# Altium PCB ESP_Watch_PCB.PcbDoc (part 1 of 2)
Units mm, origin at the board's own origin, x right, y up, seen from the top; angles counter-clockwise.
Board outline 29.7 x 35.5 mm, 4 copper layers (TOP, LY2 - GND, LY3 - GND, BOTTOM), stack 0.771 mm thick; 81 components, 71 nets, 299 pads, 0 vias.
Unrouted connection lines stored in the file: 101.
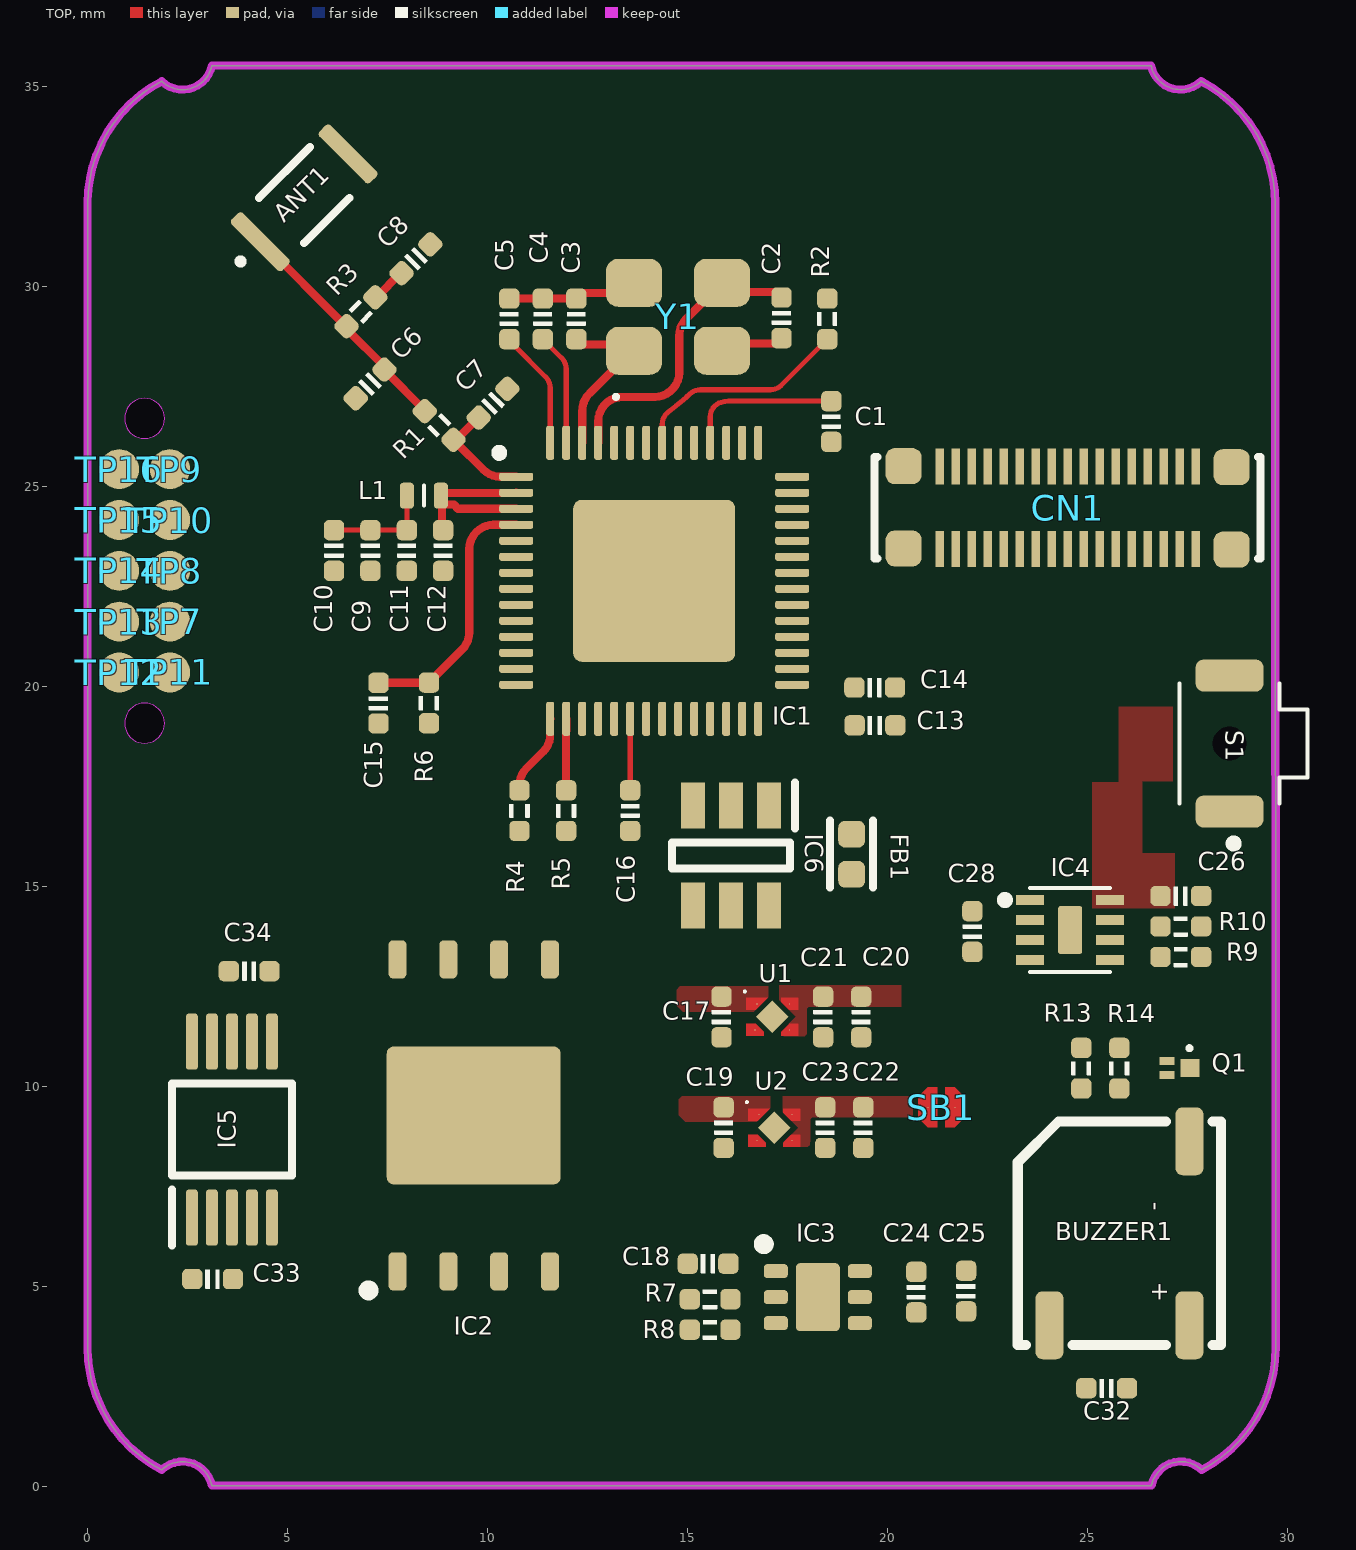
[diagram p0: TOP view]
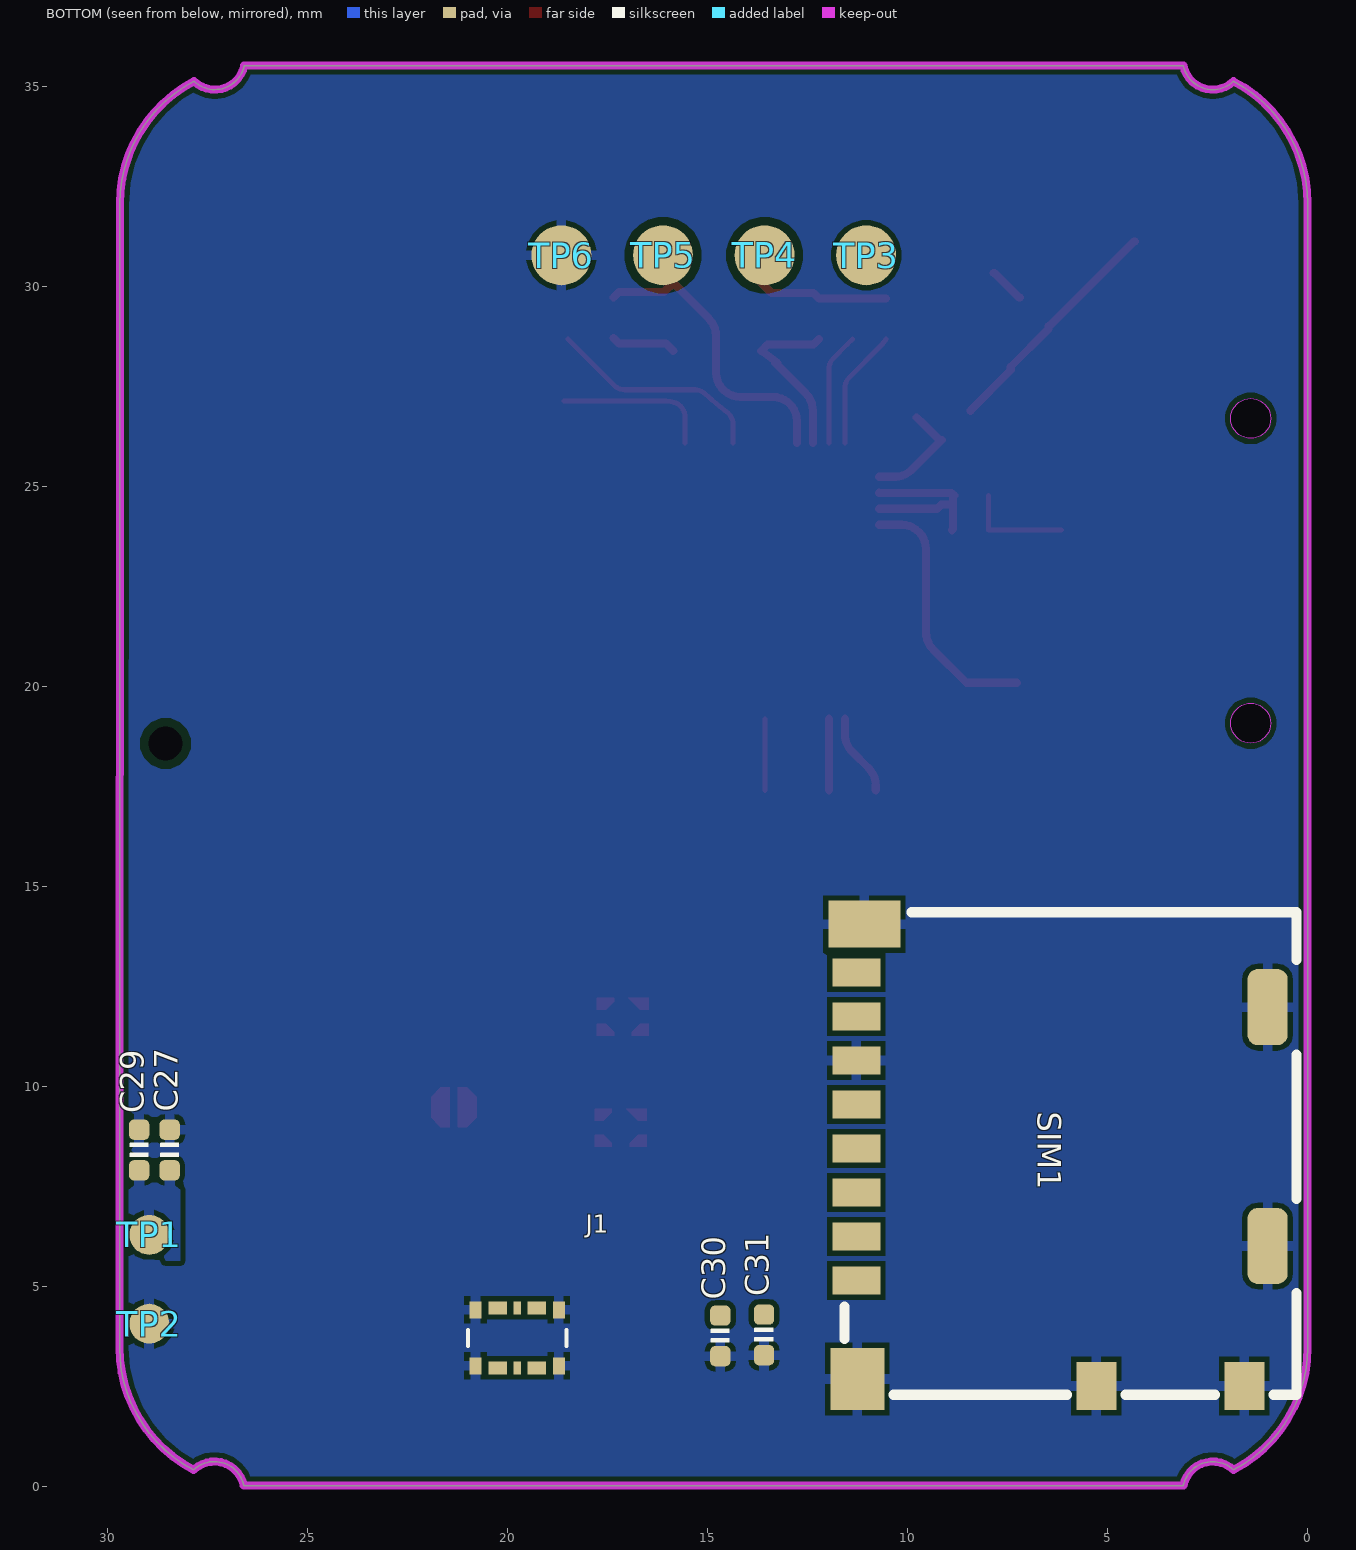
[diagram p1: BOTTOM view, seen from below]
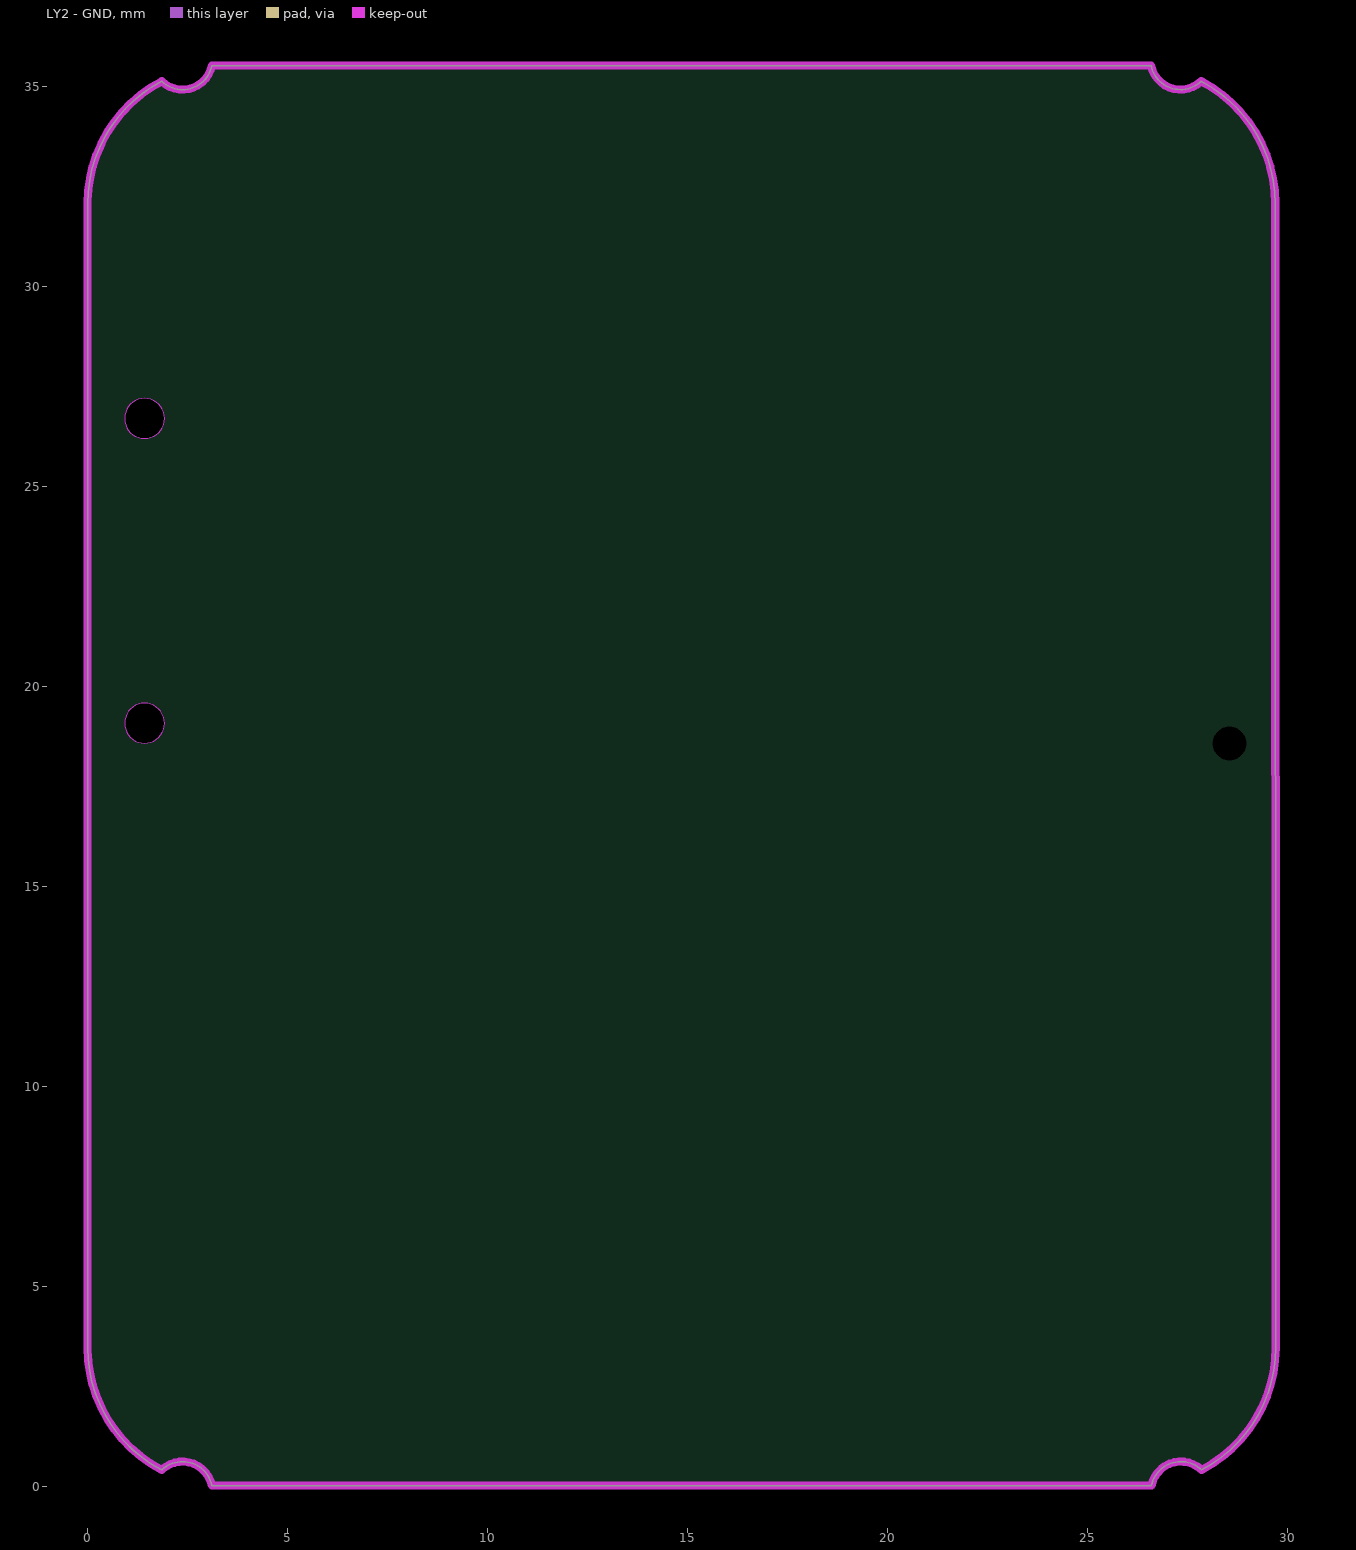
[diagram p2: LY2 - GND]
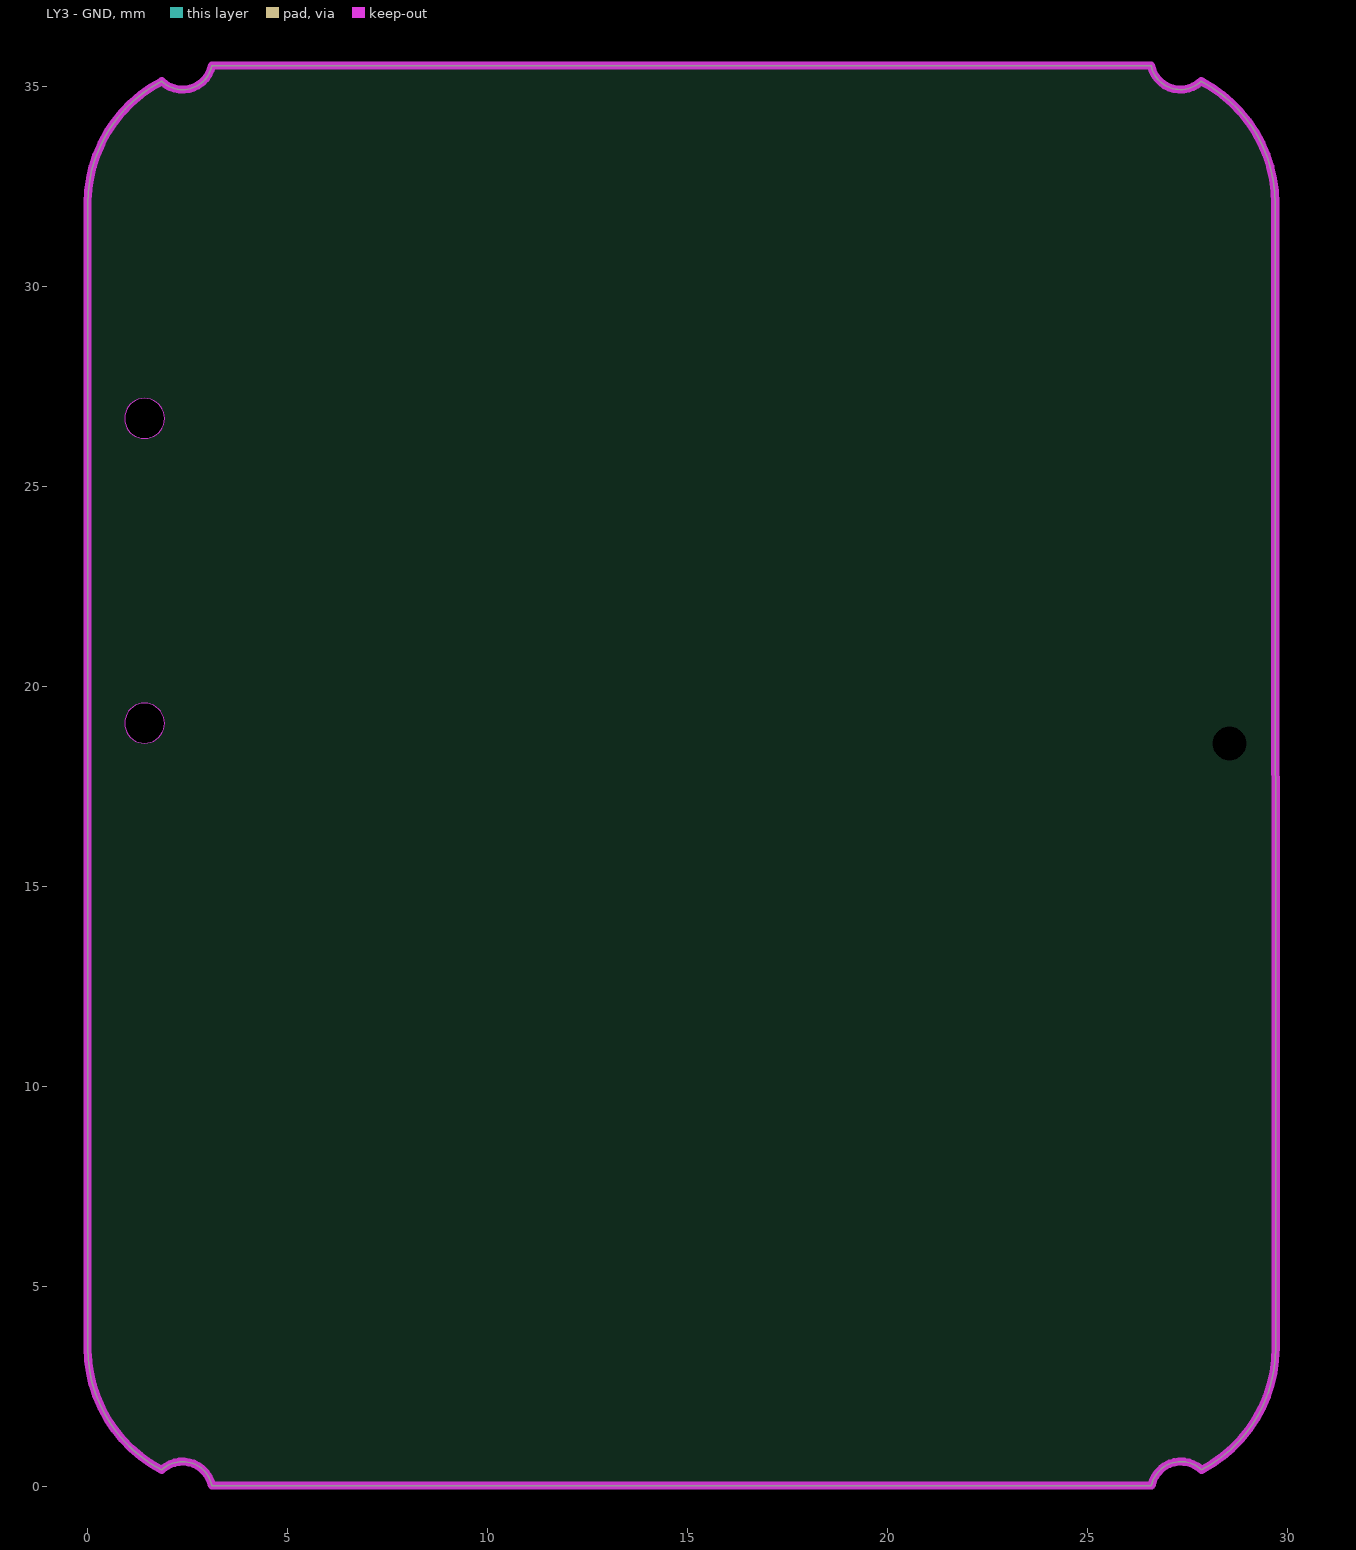
[diagram p3: LY3 - GND]

## Layer stack, top to bottom
Top Solder: solder mask 0.0432, Solder Resist, Dk 3.5
TOP: signal copper 0.035
Dielectric 2: prepreg 0.2104, PP-022, Dk 4.5
LY2 - GND: signal copper 0.0152
Dielectric2: core 0.25, Core-028, Dk 4.3
LY3 - GND: signal copper 0.0152
Dielectric 3: prepreg 0.2104, PP-022, Dk 4.5
BOTTOM: signal copper 0.035
Bottom Solder: solder mask 0.0432, Solder Resist, Dk 3.5

## Board outline
0,3.466 ccw(c3.45,3.466) 1.852,0.408 cw(c2.371,-0.134) 3.106,0.017 26.596,0.017 cw(c27.331,-0.133) 27.849,0.409 ccw(c26.252,3.467) 29.702,3.467 29.692,32.067 ccw(c26.242,32.067) 27.839,35.124 cw(c27.32,35.666) 26.585,35.516 3.106,35.515 cw(c2.371,35.665) 1.852,35.124 ccw(c3.45,32.066) 0,32.066
cut-out: 0.922,19.075 ccw(c1.422,19.075) 1.422,18.575 ccw(c1.422,19.075) 1.922,19.075 ccw(c1.422,19.075) 1.422,19.575 ccw(c1.422,19.075)
cut-out: 0.922,26.695 ccw(c1.422,26.695) 1.422,26.195 ccw(c1.422,26.695) 1.922,26.695 ccw(c1.422,26.695) 1.422,27.195 ccw(c1.422,26.695)

## Design rules (kind name [scope] priority, off if disabled: settings)
Clearance DIFFPAIR_CLEARANCE [InAnyDifferentialPair] p1: gap=0.127 ignorepadtopadclearanceinfootprint=TRUE except(0.152: Arc-Hole Track-Hole; 0.203: Arc-Poly Track-Poly SMDPad-Poly THPad-Poly Via-Poly Fill-Poly Poly-Poly)
Clearance [All] p2: gap=0.127 ignorepadtopadclearanceinfootprint=FALSE except(0.076: Arc-Fill Arc-Region Arc-Text Track-Text SMDPad-SMDPad SMDPad-THPad SMDPad-Via SMDPad-Text THPad-THPad THPad-Via THPad-Text Via-Text Fill-Text Poly-Text Region-Text Text-Text Text-Hole; 0.203: Arc-THPad Arc-Via Arc-Hole Track-THPad Track-Via Track-Hole SMDPad-Hole THPad-Hole Via-Hole Fill-Hole Poly-Hole Region-Hole)
ComponentClearance [All] p1: gap=0 collisioncheckmode=3 verticalgap=0.254 showdistances=FALSE
DiffPairsRouting [All] p1: maxlimit=0.127 minlimit=0.127 mostfreqgap=0.127 toplayer_minwidth=0.102 toplayer_maxwidth=0.152 toplayer_prefwidth=0.152 midlayer1_minwidth=0.102 midlayer1_maxwidth=0.152 midlayer1_prefwidth=0.152 midlayer6_minwidth=0.102 midlayer6_maxwidth=0.152 midlayer6_prefwidth=0.152 bottomlayer_minwidth=0.102 bottomlayer_maxwidth=0.152 bottomlayer_prefwidth=0.152 maxuncoupledlength=12.7
HoleSize BlindViaHoleSize [InDrillLayerPair('TOP - LY4 - GND') OR InDrillLayerPair('TOP - LY3 - SIG') OR InDrillLayerPair('TOP - LY2 - GND') OR InDrillLayerPair('LY7 - GND - BOTTOM') OR InDrillLayerPair('LY6 - SIG - BOTTOM')] p1: absolutevalues=TRUE maxlimit=2.54 minlimit=0.1 maxpercent=80.000 minpercent=20.000
HoleSize [All] p2: absolutevalues=TRUE maxlimit=3.835 minlimit=0.2 maxpercent=80.000 minpercent=20.000
HoleToHoleClearance HoleToHoleClearance_1 [WithinRoom('ApolloBGA') OR WithinRoom('JLINKOB')] p1: gap=0.102 allowstackedmicrovias=TRUE
HoleToHoleClearance [All] p2: gap=0.254 allowstackedmicrovias=TRUE
MinimumSolderMaskSliver APOLLOBGA_MinimumSolderMaskSliver [WithinRoom('ApolloBGA') vs HasFootprint('bga131_0p35_4p7x4p7')] p1: minsoldermaskwidth=0.025
MinimumSolderMaskSliver [All] p2: minsoldermaskwidth=0.025
PlaneConnect [All] p1: planeconnectstyle=Direct reliefexpansion=0.508 reliefentries=4 reliefconductorwidth=0.254 reliefairgap=0.254
PolygonConnect Solderbridge_PolygonConnect [(HasFootprint('sb39x18_shorted') OR HasFootprint('sb39x18')) AND InNetClass('Solderbridges')] p1: connectstyle=Direct reliefconductorwidth=0.254 reliefentries=4 polygonreliefangle="90 Angle" airgapwidth=0.254
PolygonConnect [All] p2: thpad.connectstyle=Relief thpad.reliefconductorwidth=0.254 thpad.reliefentries=4 thpad.polygonreliefangle="90 Angle" thpad.airgapwidth=0.254 smdpad.connectstyle=Relief smdpad.reliefconductorwidth=0.254 smdpad.reliefentries=4 smdpad.polygonreliefangle="90 Angle" smdpad.airgapwidth=0.127 via.connectstyle=Direct via.reliefconductorwidth=0.254 via.reliefentries=4 via.polygonreliefangle="90 Angle" via.airgapwidth=0.254
RoutingVias [All] p1: holewidth=0.3 width=0.45 viastyle="Through Hole" minholewidth=0.3 minwidth=0.45 maxholewidth=0.635 maxwidth=1.27
RoutingVias APOLLOBGA_RoutingVias [WithinRoom('ApolloBGA')] p2: holewidth=0.102 width=0.203 viastyle="Through Hole" minholewidth=0.076 minwidth=0.152 maxholewidth=0.635 maxwidth=1.27
RoutingVias JLINKOB_RoutingVias [WithinRoom('JLINKOB')] p3: holewidth=0.102 width=0.203 viastyle="Through Hole" minholewidth=0.076 minwidth=0.152 maxholewidth=0.635 maxwidth=1.27
ShortCircuit Antenna_ShortCircuit [(InNet('GND') AND InNet('NetA1_1')) vs HasFootprint('PCB_MIFA_ANTENNA')] p1: allowed=TRUE
ShortCircuit Solderbridge_ShortCiruit [HasFootprint('sb39x18_shorted') vs InNetClass('Solderbridges')] p2: allowed=TRUE
SilkToSilkClearance [All] p1: silktosilkclearance=0
SilkToSolderMaskClearance [IsPad] p1: minsilkscreentomaskgap=0 clearancetoexposedcopper=FALSE
SolderMaskExpansion [All] p1: expansion=0.05 istentingtop=FALSE
UnRoutedNet [All] p1: checkbadconnections=TRUE
Width [All] p1: maxlimit=1.27 minlimit=0.076 preferedwidth=0.102 midlayer1_maxwidth=0.508 midlayer1_prefwidth=0.089 midlayer6_maxwidth=0.508 midlayer6_prefwidth=0.089 bottomlayer_maxwidth=0.508 minimp=50.000000 maximp=50.000000 favimp=50.000000
Width APOLLOBGA_WIDTH [WithinRoom('ApolloBGA')] p2: maxlimit=0.508 minlimit=0.076 preferedwidth=0.102 midlayer1_prefwidth=0.089 midlayer6_prefwidth=0.089 minimp=50.000000 maximp=50.000000 favimp=50.000000
Width JLINKOB_WIDTH [WithinRoom('JLINKOB')] p3: maxlimit=0.508 minlimit=0.076 preferedwidth=0.102 midlayer1_prefwidth=0.089 midlayer6_prefwidth=0.089 minimp=50.000000 maximp=50.000000 favimp=50.000000
20 further rules are at their usual default settings.

## Classes and differential pairs
net class QSPI: GPIO5 GPIO6 GPIO7 GPIO8 GPIO9 GPIO13
component class "U_P02_ AMOLED": CN1
component class P07_Peripheral: BUZZER1 C30 C31 C32 C33 C34 IC5 J1 Q1 R13 R14 SIM1
component class "U_P06_ Apollo4B_core": ANT1 C1 C2 C3 C4 C5 C6 C7 C8 C9 C10 C11 C12 C13 C14 C15 C16 IC1 IC2 L1 R1 R2 R3 R4 R5 R6 S1 Y1
component class "U_P05_ Debugger": C60 J13 R37 R38 R39 R40 SB40 TP7 TP8 TP9 TP10 TP11 TP12 TP13 TP14 TP15 TP16
component class "U_P04_ USB": C36 C37 C38 D8 FB1 FB2 IC6 J5 J6 R49 SB17 SW4 TP3 TP4 TP5 TP6
component class "U_P03_ Power Supplies": C17 C18 C19 C20 C21 C22 C23 C24 C25 C26 C27 C28 C29 C35 C39 C40 C41 C43 C72 C73 C74 C75 C76 C77 C78 C79 D5 IC3 IC4 Q5 R7 R8 R9 R10 R36 R51 R52 R53 R54 R56 R57 R66 R67 SB1 SB13 SB16 SB39 SB59 SB60 SB61 TP1 TP2 U1 U2 U15 U16
differential pair AP_USB: +AP_USB_P -AP_USB_N

## Components (designator, comment, footprint, x,y, rotation, side; value= is the part's Value field where it differs from the comment)
ANT1 "ANT3216LL00R2400A" ANT3216LL00R2400A 5.414,32.211 r45 top
BUZZER1 "4000Hz" BUZ-SMD_L5.0-W5.5-P4.60 25.794,6.325 r90 top
C1 "100nF" CAP_0402 18.593,26.619 r270 top
C2 "22pF" CAP_0402 17.348,29.21 r270 top
C3 "22pF" CAP_0402 12.217,29.185 r90 top
C4 "1uF" CAP_0402 11.379,29.185 r90 top
C5 "10nF" CAP_0402 10.541,29.185 r90 top
C6 "TBD" CAP_0402 7.061,27.559 r225 top
C7 "TBD" CAP_0402 10.135,27.076 r45 top
C8 "TBD" CAP_0402 8.208,30.687 r225 top
C9 "10uF" CAP_0402 7.069,23.393 r270 top
C10 "1uF" CAP_0402 6.159,23.393 r270 top
C11 "100nF" CAP_0402 7.98,23.393 r270 top
C12 "100nF" CAP_0402 8.89,23.393 r270 top
C13 "100nF" CAP_0402 19.685,19.025 r0 top
C14 "1uF" CAP_0402 19.677,19.969 r0 top
C15 "100nF" CAP_0402 7.272,19.579 r270 top
C16 "100nF" CAP_0402 13.564,16.891 r270 top
C17 "2.2uF" CAP_0402 15.848,11.733 r270 top
C18 "2.2uF" CAP_0402 15.511,5.565 r180 top
C19 "2.2uF" CAP_0402 15.9,8.966 r270 top
C20 "1uF" CAP_0402 19.34,11.733 r270 top
C21 "100nF" CAP_0402 18.388,11.733 r270 top
C22 "1uF" CAP_0402 19.393,8.966 r270 top
C23 "100nF" CAP_0402 18.44,8.966 r270 top
C24 "1uF" CAP_0402 20.718,4.854 r90 top
C25 "100nF" CAP_0402 21.962,4.88 r90 top
C26 "2.2uF" CAP_0402 27.33,14.757 r0 top
C27 "2.2uF" CAP_0402 28.448,8.407 r90 bottom
C28 "2.2uF" CAP_0402 22.119,13.868 r270 top
C29 "100nF" CAP_0402 29.21,8.407 r90 bottom
C30 "100nF" CAP_0402 14.681,3.759 r270 bottom
C31 "1uF" CAP_0402 13.589,3.785 r270 bottom
C32 "100nF" CAP_0402 25.476,2.451 r180 top
C33 "1uF" CAP_0402 3.124,5.182 r0 top
C34 "1uF" CAP_0402 4.039,12.878 r180 top
CN1 "AXE534127" CONN-SMD_34P-P0.40_AXE534127 24.5,24.46 r180 top
FB1 "80Ω @ 100MHz" IPC_A 19.101,15.799 r90 top
IC1 "ESP32-S3R8" QFN40P700X700X90-57N-D 14.165,22.636 r0 top
IC2 "W25Q256JVEIQ_TR" SON127P800X600X80-9N-D 9.652,9.271 r90 top
IC3 "TLV75801PDRVR" SON65P200X200X80-7N 18.254,4.727 r0 top
IC4 "SGM4056-6.8YTDE8G_TR" TDFN-8L_L2.0-W2.0-P0.50-BL-EP 24.563,13.905 r270 top
IC5 "DRV2605LDGSR" SOP50P490X110-10N 3.607,8.915 r90 top
IC6 "USBLC6-2SC6" SOT95P280X145-6N 16.078,15.773 r270 top
J1 "BM29B0.6-2DS_2-0.35V_53_" BM29B062DS2035V53 19.761,3.708 r0 bottom
L1 "2nH" LQG15WH0N7B02D 8.407,24.765 r0 top
Q1 "DMN1260UFA-7B" DMN1260UFA7B 27.294,10.451 r270 top
R1 "0Ω" RES_0402 8.787,26.519 r315 top
R2 "499Ω" RES_0402 18.491,29.185 r90 top
R3 "TBD" RES_0402 6.833,29.362 r225 top
R4 "2.2kΩ" RES_0402 10.795,16.891 r90 top
R5 "2.2kΩ" RES_0402 11.963,16.891 r90 top
R6 "10kΩ" RES_0402 8.534,19.583 r270 top
R7 "61.9kΩ" RES_0402 15.562,4.676 r0 top
R8 "20kΩ" RES_0402 15.562,3.914 r180 top
R9 "10kΩ" RES_0402 27.33,13.233 r180 top
R10 "10kΩ" RES_0402 27.33,13.995 r0 top
R13 "10Ω" RES_0402 24.841,10.452 r270 top
R14 "10kΩ" RES_0402 25.794,10.452 r90 top
S1 "B3U-3000PM-B" B3U3000PMB 28.55,18.567 r270 top
SB1 "SBO" SB39X18 21.342,9.474 r180 top
SIM1 "1040310811" SIM-SMD_8P-1040310811 5.944,8.28 r270 bottom
TP1 "PAD" TPPAD_1.0MM 28.955,6.285 r180 bottom
TP2 "PAD" TPPAD_1.0MM 28.955,4.063 r180 bottom
TP3 "PAD" TPPAD_1.5MM 11.035,30.775 r90 bottom
TP4 "PAD" TPPAD_1.5MM 13.575,30.775 r90 bottom
TP5 "PAD" TPPAD_1.5MM 16.115,30.775 r90 bottom
TP6 "PAD" TPPAD_1.5MM 18.655,30.775 r90 bottom
TP7 "PAD" TPPAD_1.0MM 2.057,21.615 r90 top
TP8 "PAD" TPPAD_1.0MM 2.057,22.885 r180 top
TP9 "PAD" TPPAD_1.0MM 2.057,25.425 r180 top locked
TP10 "PAD" TPPAD_1.0MM 2.057,24.155 r180 top locked
TP11 "PAD" TPPAD_1.0MM 2.057,20.345 r90 top locked
TP12 "PAD" TPPAD_1.0MM 0.787,20.345 r90 top locked
TP13 "PAD" TPPAD_1.0mm 0.787,21.615 r90 top locked
TP14 "PAD" TPPAD_1.0mm 0.787,22.885 r90 top locked
TP15 "PAD" TPPAD_1.0mm 0.787,24.155 r90 top locked
TP16 "PAD" TPPAD_1.0mm 0.787,25.425 r90 top locked
U1 "NCP114AMX330TBG" REG_NCP114AMX330TBG 17.118,11.733 r270 top
U2 "NCP114AMX180TBG" REG_NCP114AMX330TBG 17.17,8.966 r270 top
Y1 "X322540MPB4SI" X322540MPB4SI 14.757,29.235 r0 top

## Footprints (in the part's own frame and the unit in brackets; to place one, negate y for a bottom-side part, rotate by r counter-clockwise, add the part's x,y. Pads: shape width x height; smd on the part's side, far side on the other; paste and mask are expansions set on the pad)
ANT3216LL00R2400A [mm]
  rrect50% 0.4x1.8 smd: 1(-1.55,0) 2(1.55,0)
  silkscreen extent -2.3,-0.8 1,0.8, body extent -1.6,-0.8 1.6,0.8, height 1.21
B3U3000PMB [mm]
  rrect50% 0.8x1.7 smd: 1(1.7,0) 2(-1.7,0)
  round 0.425 hole 0.85 unplated: 3(0,0)
  silkscreen extent -1.5,-1.25 2.6,1.95, body extent -2,-1.25 2,1.95, height 1.2
BM29B062DS2035V53 [mm]
  rect 0.46x0.32 smd: 1(-0.49,-0.75) 2(-0.49,0.75) 5(0.49,-0.75) 6(0.49,0.75)
  rect 0.18x0.32 smd: 3(0,-0.75) 4(0,0.75)
  rect 0.3x0.42 smd: MP1(-1.04,-0.7) MP2(-1.04,0.7) MP3(1.04,-0.7) MP4(1.04,0.7)
  silkscreen extent -1.23,-0.2 1.23,0.2, body extent -1.23,-0.89 1.23,0.89, height 0.8
BUZ-SMD_L5.0-W5.5-P4.60 [mm]
  rrect50% 1.7x0.7 smd paste+0 mask+0.051: 1(-2.3,-1.75) 2(2.3,-1.75) 3(-2.3,1.75)
  silkscreen extent -2.79,-2.54 2.79,2.54, body extent -2.6,-2.63 2.6,2.63, height 2.01
CAP_0402 [mil]
  rrect50% 20x20 smd: 1(-20,0) 2(20,0)
  silkscreen extent -7,-9 7,9, body extent -20,-10 20,10, height 20
CONN-SMD_34P-P0.40_AXE534127 [mm]
  rect 0.21x0.9 smd: 1(-3.2,-1.03) 2(-2.8,-1.03) 3(-2.4,-1.03) 4(-2,-1.03) 5(-1.6,-1.03) 6(-1.2,-1.03) 7(-0.8,-1.03) 8(-0.4,-1.03) 9(0,-1.03) 10(0.4,-1.03) 11(0.8,-1.03) 12(1.2,-1.03) 13(1.6,-1.03) 14(2,-1.03) 15(2.4,-1.03) 16(2.8,-1.03) 17(3.2,-1.03) 18(3.2,1.03) 19(2.8,1.03) 20(2.4,1.03) 21(2,1.03) 22(1.6,1.03) 23(1.2,1.03) 24(0.8,1.03) 25(0.4,1.03) 26(0,1.03) 27(-0.4,1.03) 28(-0.8,1.03) 29(-1.2,1.03) 30(-1.6,1.03) 31(-2,1.03) 32(-2.4,1.03) 33(-2.8,1.03) 34(-3.2,1.03)
  rrect50% 0.9x0.9 smd: 35(-4.1,1.044) 36(-4.1,-1.016) 37(4.1,-1.044) 38(4.1,1.016)
  silkscreen extent -4.83,-1.27 4.83,1.27, body extent -4.65,-1.25 4.65,1.25, height 0.77
DMN1260UFA7B [mm]
  rect 0.45x0.475 smd: 1(0,0.263)
  rect 0.2x0.375 smd: 2(-0.175,-0.312) 3(0.175,-0.312)
  silkscreen extent -0.55,0.2 -0.45,0.3, body extent -0.33,-0.43 0.33,0.43, height 0.35
IPC_A [mm]
  rrect50% 0.668x0.672 smd mask+0.051: 1(-0.502,0) 2(0.502,0)
  silkscreen extent -0.83,-0.54 0.84,0.54, body extent -0.53,-0.27 0.53,0.28, height 0.4
LQG15WH0N7B02D [mm]
  rrect50% 0.35x0.65 smd: 1(-0.425,0) 2(0.425,0)
  silkscreen extent 0,-0.25 0,0.25, body extent -0.5,-0.25 0.5,0.25, height 0.55
QFN40P700X700X90-57N-D [mm]
  rrect50% 0.85x0.2 smd: 1(-3.45,2.6) 2(-3.45,2.2) 3(-3.45,1.8) 4(-3.45,1.4) 5(-3.45,1) 6(-3.45,0.6) 7(-3.45,0.2) 8(-3.45,-0.2) 9(-3.45,-0.6) 10(-3.45,-1) 11(-3.45,-1.4) 12(-3.45,-1.8) 13(-3.45,-2.2) 14(-3.45,-2.6) 29(3.45,-2.6) 30(3.45,-2.2) 31(3.45,-1.8) 32(3.45,-1.4) 33(3.45,-1) 34(3.45,-0.6) 35(3.45,-0.2) 36(3.45,0.2) 37(3.45,0.6) 38(3.45,1) 39(3.45,1.4) 40(3.45,1.8) 41(3.45,2.2) 42(3.45,2.6)
  rrect50% 0.2x0.85 smd: 15(-2.6,-3.45) 16(-2.2,-3.45) 17(-1.8,-3.45) 18(-1.4,-3.45) 19(-1,-3.45) 20(-0.6,-3.45) 21(-0.2,-3.45) 22(0.2,-3.45) 23(0.6,-3.45) 24(1,-3.45) 25(1.4,-3.45) 26(1.8,-3.45) 27(2.2,-3.45) 28(2.6,-3.45) 43(2.6,3.45) 44(2.2,3.45) 45(1.8,3.45) 46(1.4,3.45) 47(1,3.45) 48(0.6,3.45) 49(0.2,3.45) 50(-0.2,3.45) 51(-0.6,3.45) 52(-1,3.45) 53(-1.4,3.45) 54(-1.8,3.45) 55(-2.2,3.45) 56(-2.6,3.45)
  rrect10% 4.05x4.05 smd: 57(0,0)
  silkscreen extent -3.97,3.1 -3.78,3.3, body extent -3.55,-3.55 3.55,3.55, height 0.9
REG_NCP114AMX330TBG [mm]
  round 0.025 smd: 1(-0.325,-0.385) 2(0.325,-0.435) 3(0.325,0.435) 4(-0.325,0.435)
  rect 0.58x0.58 smd rot 45 mask+0: 5(0,0)
  TOP region: 0.475,0.22 0.375,0.22 0.175,0.42 0.175,0.65 0.475,0.65
  TOP region: -0.175,0.42 -0.375,0.22 -0.475,0.22 -0.475,0.65 -0.175,0.65
  TOP region: -0.175,-0.42 -0.175,-0.65 -0.475,-0.65 -0.475,-0.12
  TOP region: 0.475,-0.65 0.175,-0.65 0.175,-0.42 0.375,-0.22 0.475,-0.22
  silkscreen extent -0.66,-0.71 -0.61,-0.66, body extent -0.5,-0.5 0.5,0.5, height 0.58
RES_0402 [mil]
  rrect50% 20x20 smd: 1(-20,0) 2(20,0)
  silkscreen extent -7,-10 6,10, body extent -20,-10 20,10, height 14
SB39X18 [mil] "SB39X18"
  round 1 smd: 1(-13.25,0) 2(13.25,0)
  TOP region: 22.5,10.4 22.5,-10.4 13.3,-19.7 4,-19.7 4,19.7 13.3,19.7 22.5,10.4
  TOP region: -22.5,-10.4 -22.5,10.4 -13.3,19.7 -4,19.7 -4,-19.7 -13.3,-19.7 -22.5,-10.4
  TOP region: 22.5,10.4 22.5,-10.4 13.3,-19.7 4,-19.7 4,19.7 13.3,19.7 22.5,10.4
  TOP region: -22.5,-10.4 -22.5,10.4 -13.3,19.7 -4,19.7 -4,-19.7 -13.3,-19.7 -22.5,-10.4
SIM-SMD_8P-1040310811 [mm]
  rect 0.7x1.2 smd paste+0 mask+0.051: 1(3.138,-5.337) 2(2.037,-5.337) 3(0.938,-5.337) 4(-0.162,-5.337) 5(-1.263,-5.337) 6(-2.363,-5.337) 7(-3.462,-5.337) 8(-4.562,-5.337)
  rect 1.17x1.8 smd paste+0 mask+0.051: 9(-5.773,-5.138)
  rect 1.55x1.35 smd paste+0 mask+0.051: 10(5.598,-5.313)
  rect 1.2x1 smd paste+0 mask+0.051: 11(5.773,0.663) 12(5.773,4.363)
  rrect50% 1.9x1 smd paste+0 mask+0.051: 13(2.273,4.944) 14(-3.697,4.944)
  silkscreen extent -6.07,-5.64 5.99,5.67, body extent -5.97,-5.55 5.98,5.85, height 1.47
SON65P200X200X80-7N [mm]
  rrect50% 0.6x0.35 smd: 1(-1.05,0.65) 2(-1.05,0) 3(-1.05,-0.65) 4(1.05,-0.65) 5(1.05,0) 6(1.05,0.65)
  rrect20% 1.1x1.7 smd: 7(0,0)
  silkscreen extent -1.47,1.2 -1.22,1.45, body extent -1.05,-1 1.05,1, height 0.8
SON127P800X600X80-9N-D [mm]
  rrect50% 0.95x0.45 smd: 1(-3.9,1.905) 2(-3.9,0.635) 3(-3.9,-0.635) 4(-3.9,-1.905) 5(3.9,-1.905) 6(3.9,-0.635) 7(3.9,0.635) 8(3.9,1.905)
  rrect10% 3.45x4.35 smd: 9(0,0)
  silkscreen extent -4.5,2.5 -4.25,2.75, body extent -4.05,-3 4.05,3, height 0.8
SOP50P490X110-10N [mm]
  rrect50% 1.4x0.3 smd: 1(-2.2,1) 2(-2.2,0.5) 3(-2.2,0) 4(-2.2,-0.5) 5(-2.2,-1) 6(2.2,-1) 7(2.2,-0.5) 8(2.2,0) 9(2.2,0.5) 10(2.2,1)
  silkscreen extent -2.9,-1.5 1.15,1.5, body extent -2.45,-1.5 2.45,1.5, height 1.1
SOT95P280X145-6N [mm]
  rect 1.15x0.6 smd: 1(-1.25,0.95) 2(-1.25,0) 3(-1.25,-0.95) 4(1.25,-0.95) 5(1.25,0) 6(1.25,0.95)
  silkscreen extent -1.83,-1.48 0.33,1.6, body extent -1.4,-1.48 1.4,1.48, height 1.45
TDFN-8L_L2.0-W2.0-P0.50-BL-EP [mm]
  rect 0.25x0.7 smd: 1(-0.75,-1) 2(-0.25,-1) 3(0.25,-1) 4(0.75,-1) 5(0.75,1) 6(0.25,1) 7(-0.25,1) 8(-0.75,1)
  rrect20% 1.2x0.6 smd: 9(0,-0.001)
  silkscreen extent -1.05,-1.68 1.05,1, body extent -1,-1.05 1,1.05, height 0.8
TPPAD_1.0MM [mm] "A 1.5mm Copper Pad Testpoint"
  round 1 smd paste-0.75: TP(0,0)
TPPAD_1.0mm [mm] "A 1.5mm Copper Pad Testpoint"
  round 1 smd paste-0.75: TP(0,0)
TPPAD_1.5MM [mm] "A 1.5mm Copper Pad Testpoint"
  round 1.5 smd paste-0.75: TP(0,0)
  body extent -0.75,-0.75 0.75,0.75, height 0.1
X322540MPB4SI [mm]
  rrect50% 1.4x1.2 smd: 1(-1.1,-0.85) 2(1.1,-0.85) 3(1.1,0.85) 4(-1.1,0.85)
  silkscreen extent -1.6,-2.05 -1.5,-1.95, body extent -1.68,-1.33 1.68,1.33, height 0.9

## Part data
ANT1: "Antenna", Manufacturer_Name="Pulse Electronics", Mouser Part Number=603-ANT3216LL00R2400, Datasheet Link=https://eu.mouser.com/datasheet/2/336/datasheet_ant3216ll00r2400a_v1_1617827483-2529684.pdf, Height=1.35mm, Manufacturer_Part_Number=ANT3216LL00R2400A, Mouser Price/Stock=https://www.mouser.co.uk/ProductDetail/Pulse-Electronics/ANT3216LL00R2400A?qs=VAB4DzKv5wVywAIgVVebaA%3D%3D
BUZZER1: library part MLT-5020, JLCPCB Part Class=扩展库, Manufacturer=华能, Add into BOM=yes, Convert to PCB=yes, Datasheet=https://atta.szlcsc.com/upload/public/pdf/source/20210811/111454390007D221D7259018FB170E62.pdf, Device=MLT-5020, Height=2.5mm, LCSC Part Name=MLT-5020, Length=5.2mm, Manufacturer Part=MLT-5020, Name=4000Hz, Oscillator Circuit=无源(外部驱动), Supplier=LCSC, Supplier Footprint=SMD,5x5mm, Supplier Part=C94598, Symbol=MLT-5020, Technology Type=电磁式, Width=5.2mm
C1 C2 C3 C5 C6 C7 C8 C9 C11 C12 C13 C15 C16: library part Capacitor, "NONE", Capacitance=1uF, Case Code (Imperial)=0402, Case Code (Metric)=1005, Dielectric=X5R, Manufacturer=Samsung, Manufacturer Part Number=CL05A105MP5NNNC, Max Operating Temperature=85°C, Min Operating Temperature=-55°C, Package Quantity=1, Supplier Part Number 1=82AC9184, Tolerance=20%, Voltage Rating=10V, AMBIQ PN=CL05A105KP5NNNC, Case/Package=0402, Category="Ceramic Capacitors", ComponentLink1Description=https://datasheet.ciiva.com/25802/cl05a105mp5nnnc-25802049.pdf?src-supplier=Digi-Key, ComponentLink1URL=https://datasheet.ciiva.com/25802/cl05a105mp5nnnc-25802049.pdf?src-supplier=Digi-Key, Construction=Flat, Depth=0.5mm, Height=0.5mm, Lead Free="Lead Free", Length=1mm, Mount="Surface Mount", Packaging="Tape and Reel", Radiation Hardening=No, RoHS=Yes, RoHS Compliant=Yes, Series=CL, Supplier 1=Newark, Thickness=0.022inch, Voltage Rating (DC)=10V, Width=0.02inch
C4 C10 C14 C20 C24 C31 C33 C34: library part Capacitor, "NONE", Case Code (Imperial)=0402, Case Code (Metric)=1005, Dielectric=X5R, Manufacturer=Samsung, Manufacturer Part Number=CL05A105MP5NNNC, Max Operating Temperature=85°C, Min Operating Temperature=-55°C, Package Quantity=1, Supplier Part Number 1=82AC9184, Tolerance=20%, Voltage Rating=10V, AMBIQ PN=CL05A105KP5NNNC, Capacitance=1uF, Case/Package=0402, Category="Ceramic Capacitors", ComponentLink1Description=https://datasheet.ciiva.com/25802/cl05a105mp5nnnc-25802049.pdf?src-supplier=Digi-Key, ComponentLink1URL=https://datasheet.ciiva.com/25802/cl05a105mp5nnnc-25802049.pdf?src-supplier=Digi-Key, Construction=Flat, Depth=0.5mm, Height=0.5mm, Lead Free="Lead Free", Length=1mm, Mount="Surface Mount", Packaging="Tape and Reel", Radiation Hardening=No, RoHS=Yes, RoHS Compliant=Yes, Series=CL, Supplier 1=Newark, Thickness=0.022inch, Voltage Rating (DC)=10V, Width=0.02inch
C17 C18 C26 C27 C28: library part Capacitor, "NONE", Case Code (Imperial)=0402, Case Code (Metric)=1005, Manufacturer=Samsung, Manufacturer Part Number=CL05A225KP5NNNC, Max Operating Temperature=85°C, Min Operating Temperature=-55°C, Package Quantity=1, Tolerance=10%, Voltage Rating=10V, AMBIQ PN=CL05A225KP5NNNC, Capacitance=2.2uF, Case/Package=0402, Category="Ceramic Capacitors", ComponentLink1Description=https://datasheet.ciiva.com/25727/cl05a225kp5nnnc-25727777.pdf?src-supplier=Digi-Key, ComponentLink1URL=https://datasheet.ciiva.com/25727/cl05a225kp5nnnc-25727777.pdf?src-supplier=Digi-Key, Length=0.039inch, Mount="Surface Mount", Packaging="Tape and Reel", Pricing 1="1=0.14620, 10=0.09980, 25=0.09880, 100=0.05200, 250=0.05150, 500=0.03630, 1000=0.02990, 3000=0.02760, 6000=0.02610, 15000=0.023", RoHS=Yes, RoHS Compliant=Yes, Series=CL, Stock 1=32414, Supplier 1="Arrow Electronics", Supplier Part Number 1=CL05A225KP5NNNC, Thickness=0.022inch, Voltage Rating (DC)=10V, Width=0.02inch
C19: library part CL05A225KP5NNNC, "NONE", Case Code (Imperial)=0402, Case Code (Metric)=1005, Manufacturer=Samsung, Max Operating Temperature=85°C, Min Operating Temperature=-55°C, Package Quantity=1, Tolerance=10%, Voltage Rating=10V, AMBIQ PN=CL05A225KP5NNNC, Capacitance=2.2uF, Case/Package=0402, Category="Ceramic Capacitors", ComponentLink1Description=https://datasheet.ciiva.com/25727/cl05a225kp5nnnc-25727777.pdf?src-supplier=Digi-Key, ComponentLink1URL=https://datasheet.ciiva.com/25727/cl05a225kp5nnnc-25727777.pdf?src-supplier=Digi-Key, Length=0.039inch, Manufacturer Part Number=CL05A225KP5NNNC, Mount="Surface Mount", Packaging="Tape and Reel", Pricing 1="1=0.14620, 10=0.09980, 25=0.09880, 100=0.05200, 250=0.05150, 500=0.03630, 1000=0.02990, 3000=0.02760, 6000=0.02610, 15000=0.023", RoHS=Yes, RoHS Compliant=Yes, Series=CL, Stock 1=32414, Supplier 1="Arrow Electronics", Supplier Part Number 1=CL05A225KP5NNNC, Thickness=0.022inch, Voltage Rating (DC)=10V, Width=0.02inch
C21 C23 C25 C29 C30 C32: library part Capacitor, "NONE", Case Code (Imperial)=0201, Case Code (Metric)=0603, Manufacturer="Kyocera AVX", Manufacturer Part Number=0201ZD104KAT2A, Max Operating Temperature=85°C, Min Operating Temperature=-55°C, Tolerance=10%, Voltage Rating=10V, AMBIQ PN=0201ZD104KAT2A, Capacitance=100nF, Case/Package=0201, Category="Ceramic Capacitors", ComponentLink1Description=http://www.mouser.com/ds/2/40/cx5r-776519.pdf?src-supplier=Mouser, ComponentLink1URL=http://www.mouser.com/ds/2/40/cx5r-776519.pdf?src-supplier=Mouser, Lead Free="Lead Free", Mount="Surface Mount", Packaging="Tape and Reel", Pricing 1="15000=0.00770, 30000=0.00750, 45000=0.00740, 60000=0.00720, 75000=0.00690, 150000=0.00620 (USD)", RoHS=Yes, RoHS Compliant=Yes, Series=-, Stock 1=105000, Supplier 1="Arrow Electronics", Supplier Part Number 1=0201ZD104KAT2A, Voltage Rating (DC)=10V
C22: library part CL05A105KP5NNNC, "NONE", Case Code (Imperial)=0402, Case Code (Metric)=1005, Dielectric=X5R, Manufacturer=Samsung, Manufacturer Part Number=CL05A105MP5NNNC, Max Operating Temperature=85°C, Min Operating Temperature=-55°C, Package Quantity=1, Supplier Part Number 1=82AC9184, Tolerance=20%, Voltage Rating=10V, AMBIQ PN=CL05A105KP5NNNC, Capacitance=1uF, Case/Package=0402, Category="Ceramic Capacitors", ComponentLink1Description=https://datasheet.ciiva.com/25802/cl05a105mp5nnnc-25802049.pdf?src-supplier=Digi-Key, ComponentLink1URL=https://datasheet.ciiva.com/25802/cl05a105mp5nnnc-25802049.pdf?src-supplier=Digi-Key, Construction=Flat, Depth=0.5mm, Height=0.5mm, Lead Free="Lead Free", Length=1mm, Mount="Surface Mount", Packaging="Tape and Reel", Radiation Hardening=No, RoHS=Yes, RoHS Compliant=Yes, Series=CL, Supplier 1=Newark, Thickness=0.022inch, Voltage Rating (DC)=10V, Width=0.02inch
CN1: JLCPCB Part Class=扩展库, Add into BOM=yes, Convert to PCB=yes, Datasheet=https://atta.szlcsc.comnull, Device=AXE534127, LCSC Part Name=AXE534127, Manufacturer Part=AXE534127, Name=AXE534127, Supplier=LCSC, Supplier Footprint=SMD-34, Supplier Part=C9900017244, Symbol=AXE534127
FB1: library part Ferrite, "NONE", Case Code (Imperial)=1206, Case Code (Metric)=3216, DC Resistance (DCR)=10mR, Frequency=100MHz, Manufacturer="Taiyo Yuden", Manufacturer Part Number=FBMJ3216HS800-T, Max Current Rating=4A, Max Operating Temperature=125°C, Min Operating Temperature=-40°C, Package Quantity=1, Resistor Type="Ferrite Bead", Supplier Part Number 1=86H5353, Tolerance=25%, AMBIQ PN=FBMJ3216HS800-T, Case/Package=1206, Category="Ferrite Beads and Chips", ComponentLink1Description=https://datasheet.ciiva.com/5709/chipbeads01-e-5709344.pdf?src-supplier=Farnell, ComponentLink1URL=https://datasheet.ciiva.com/5709/chipbeads01-e-5709344.pdf?src-supplier=Farnell, ComponentLink2Description=https://datasheet.ciiva.com/16001/202fbmj3216hs800-t-16001070.pdf?src-supplier=Onlinecomponents.com, ComponentLink2URL=https://datasheet.ciiva.com/16001/202fbmj3216hs800-t-16001070.pdf?src-supplier=Onlinecomponents.com, ComponentLink3Description=https://datasheet.ciiva.com/30088/23fbmj3216hs800-t-30088710.pdf?src-supplier=Onlinecomponents.com, ComponentLink3URL=https://datasheet.ciiva.com/30088/23fbmj3216hs800-t-30088710.pdf?src-supplier=Onlinecomponents.com, ComponentLink4Description=https://datasheet.ciiva.com/23606/fbmj3216hs800-t-ss-23606768.pdf?src-supplier=Newark, ComponentLink4URL=https://datasheet.ciiva.com/23606/fbmj3216hs800-t-ss-23606768.pdf?src-supplier=Newark, ComponentLink5Description=https://datasheet.ciiva.com/25614/0900766b810b37be-25614395.pdf?src-supplier=RSComponents, ComponentLink5URL=https://datasheet.ciiva.com/25614/0900766b810b37be-25614395.pdf?src-supplier=RSComponents, ComponentLink6Description=https://datasheet.ciiva.com/6212/chipbeads01-e-6212909.pdf?src-supplier=Digi-Key, ComponentLink6URL=https://datasheet.ciiva.com/6212/chipbeads01-e-6212909.pdf?src-supplier=Digi-Key, ComponentLink7Description=https://datasheet.ciiva.com/7966/chipbeads01-e-7966171.pdf?src-supplier=Element14, ComponentLink7URL=https://datasheet.ciiva.com/7966/chipbeads01-e-7966171.pdf?src-supplier=Element14, Core Material=Ferrite, Depth=1.8mm, Halogen Free="Halogen Free", Height=1.3mm, Impedance=80R, Lead Free="Lead Free", Length=3.2mm, Material=Ferrite, Max DC Current=4A, Mount="Surface Mount", Number of Lines=1, Number of Pins=2, Packaging="Tape and Reel", Pricing 1="1=0.30000, 10=0.20700, 25=0.17700, 50=0.14800, 100=0.11800 (USD)", REACH SVHC="No SVHC", Resistance=10mR, RoHS=Yes, Series=FB, Shielding=Unshielded, Stock 1=265, Supplier 1=Newark, Termination=SMD/SMT, Test Frequency=100MHz, Width=0.063inch
IC1: "Integrated Circuit", Manufacturer_Name="Espressif Systems", Mouser Part Number=356-ESP32-S3R8, Datasheet Link=https://www.espressif.com/sites/default/files/documentation/esp32-s3_datasheet_en.pdf, Height=0.9mm, Manufacturer_Part_Number=ESP32-S3R8, Mouser Price/Stock=https://www.mouser.co.uk/ProductDetail/Espressif-Systems/ESP32-S3R8?qs=Rp5uXu7WBW%252Bto4RqH8CMng%3D%3D
IC2: "Integrated Circuit", Arrow Part Number="W25Q256JVEIQ TR", Manufacturer_Name=Winbond, Mouser Part Number=454-W25Q256JVEIQTR, Arrow Price/Stock=https://www.arrow.com/en/products/w25q256jveiqtr/winbond-electronics?region=nac, Datasheet Link=http://www.winbond.com/resource-files/w25q256jv%20spi%20reve%2002102017.pdf, Height=0.8mm, Manufacturer_Part_Number="W25Q256JVEIQ TR", Mouser Price/Stock=https://www.mouser.co.uk/ProductDetail/Winbond/W25Q256JVEIQ-TR?qs=qSfuJ%252Bfl%2Fd4d16629NnShw%3D%3D
IC3: "Integrated Circuit", Manufacturer_Name="Texas Instruments", Mouser Part Number=595-TLV75801PDRVR, Arrow Part Number=TLV75801PDRVR, Arrow Price/Stock=https://www.arrow.com/en/products/tlv75801pdrvr/texas-instruments?region=europe, Datasheet Link=http://www.ti.com/lit/gpn/TLV758P, Height=0.8mm, Manufacturer_Part_Number=TLV75801PDRVR, Mouser Price/Stock=https://www.mouser.co.uk/ProductDetail/Texas-Instruments/TLV75801PDRVR?qs=PqoDHHvF64%2FZ6DyDKfEo8A%3D%3D
IC4: "Integrated Circuit", Manufacturer_Name=SGMICRO, Manufacturer_Part_Number=SGM4056-10.5YTDE8G/TR, Datasheet Link=https://4donline.ihs.com/images/VipMasterIC/IC/SGML/SGML-S-A0002247971/SGML-S-A0002247971-1.pdf?hkey=EF798316E3902B6ED9A73243A3159BB0, Height=0.8mm
IC5: "Integrated Circuit", Manufacturer_Name="Texas Instruments", Mouser Part Number=595-DRV2605LDGSR, Arrow Part Number=DRV2605LDGSR, Arrow Price/Stock=https://www.arrow.com/en/products/drv2605ldgsr/texas-instruments?region=nac, Datasheet Link=http://www.ti.com/lit/gpn/drv2605l, Height=1.1mm, Manufacturer_Part_Number=DRV2605LDGSR, Mouser Price/Stock=https://www.mouser.co.uk/ProductDetail/Texas-Instruments/DRV2605LDGSR?qs=asCBFxFfL1QnLacQzdinMg%3D%3D
IC6: "Integrated Circuit", Manufacturer_Name=STMicroelectronics, Mouser Part Number=511-USBLC6-2SC6, Arrow Part Number=USBLC6-2SC6, Arrow Price/Stock=https://www.arrow.com/en/products/usblc6-2sc6/stmicroelectronics?region=nac, Datasheet Link=http://www.st.com/st-web-ui/static/active/en/resource/technical/document/datasheet/CD00050750.pdf, Height=1.45mm, Manufacturer_Part_Number=USBLC6-2SC6, Mouser Price/Stock=https://www.mouser.co.uk/ProductDetail/STMicroelectronics/USBLC6-2SC6?qs=po45yt2pPpu%2FhNIlwQdTlg%3D%3D
J1: "Connector", Manufacturer_Name=Hirose, Manufacturer_Part_Number=BM29B0.6-2DS/2-0.35V(53), Mouser Part Number=798-BM29B62DS2035V53, Datasheet Link=https://datasheet.lcsc.com/szlcsc/Hirose-HRS-BM29B0-6-2DS-2-0-35V-53_C202084.pdf, Height=0.7mm, Mouser Price/Stock=https://www.mouser.co.uk/ProductDetail/Hirose-Connector/BM29B0.6-2DS-2-0.35V53?qs=NniTrqY%252BJ%252BULjtWh9kFSwA%3D%3D
L1: library part LQG15HS2N0S02D, "Inductor", Manufacturer_Name="Murata Electronics", Mouser Part Number=81-LQG15HS2N0S02D, Arrow Part Number=LQG15HS2N0S02D, Arrow Price/Stock=https://www.arrow.com/en/products/lqg15hs2n0s02d/murata-manufacturing?region=nac, Datasheet Link=https://psearch.en.murata.com/inductor/product/LQG15HS2N0S02%23.html, Height=0.55mm, Manufacturer_Part_Number=LQG15HS2N0S02D, Mouser Price/Stock=https://www.mouser.co.uk/ProductDetail/Murata-Electronics/LQG15HS2N0S02D?qs=z7wylDbq%2FU6uWxpTRPm4gA%3D%3D
Q1: "MOSFET (N-Channel)", Manufacturer_Name="Diodes Incorporated", Mouser Part Number=621-DMN1260UFA-7B, Arrow Part Number=DMN1260UFA-7B, Arrow Price/Stock=https://www.arrow.com/en/products/dmn1260ufa-7b/diodes-incorporated, Datasheet Link=https://www.diodes.com/assets/Datasheets/DMN1260UFA.pdf, Height=0.4mm, Manufacturer_Part_Number=DMN1260UFA-7B, Mouser Price/Stock=https://www.mouser.co.uk/ProductDetail/Diodes-Incorporated/DMN1260UFA-7B?qs=TL2rE588Q1GjQdkyrZCA4w%3D%3D
R1 R2 R3 R4 R5 R6 R8: library part Resistor, "Res Thick Film 0402 20K Ohm 1% 1/16W ±100ppm/°C Molded SMD Paper T/R", Case Code (Imperial)=0402, Case Code (Metric)=1005, Manufacturer=Vishay, Manufacturer Part Number=CRCW040220K0FKED, Max Operating Temperature=155°C, Max Power Dissipation=63mW, Min Operating Temperature=-55°C, Package Quantity=10, Resistance=20kR, Resistance Tolerance=1%, Resistor Type="Thick Film", Supplier Part Number 1=24W2083, Temperature Coefficient=100ppm/°C, Voltage Rating=50V, AMBIQ PN=CRCW040220K0FKED, Case/Package=0402, Category="Chip SMD Resistors", ComponentLink1Description=https://datasheet.ciiva.com/11810/0900766b80d98824-11810023.pdf?src-supplier=RSComponents, ComponentLink1URL=https://datasheet.ciiva.com/11810/0900766b80d98824-11810023.pdf?src-supplier=RSComponents, ComponentLink2Description=https://datasheet.ciiva.com/2463/dcrcwe3-2463139.pdf?src-supplier=Digi-Key, ComponentLink2URL=https://datasheet.ciiva.com/2463/dcrcwe3-2463139.pdf?src-supplier=Digi-Key, ComponentLink3URL=https://datasheet.ciiva.com/2463/dcrcwe3-2463140.pdf?src-supplier=Digi-Key, Construction=Rectangular, Contact Plating=Tin, Depth=0.5mm, Features="Automotive AEC-Q200", Height=0.35mm, Lead Free="Lead Free", Length=1mm, Military Standard=Not, Mount="Surface Mount", Number of Pins=2, Number of Terminations=2, Packaging="Tape and Reel", Power Rating=63mW, Pricing 1="1=0.00600, 10000=0.00600 (USD)", Radiation Hardening=No, REACH SVHC=Unknown, RoHS=Yes, RoHS Compliant=Yes, Series=CRCW, Stock 1=380000, Supplier 1=Newark, Technology="THICK FILM", Termination=SMD/SMT, Tolerance=1%, Voltage Rating (DC)=50V, Weight=2.3E-05oz, Width=0.5mm, Working Voltage=50V
R7: library part Resistor, "Res Thick Film 0402 61.9K Ohm 1% 1/10W +/-100ppm/ßC Molded SMD Punched Carrier T/R", Case Code (Imperial)=0402, Case Code (Metric)=1005, Manufacturer=Panasonic, Manufacturer Part Number=ERJ-2RKF6192X, Max Operating Temperature=155°C, Max Power Dissipation=100mW, Min Operating Temperature=-55°C, Package Quantity=1, Resistance=61.9kR, Resistance Tolerance=1%, Resistor Type="Thick Film", Temperature Coefficient=100ppm/°C, Voltage Rating=50V, AMBIQ PN=ERJ-2RKF6192X, Case/Package=0402, Category="Chip SMD Resistors", ComponentLink1Description=https://datasheet.ciiva.com/31404/1678782-31404872.pdf?src-supplier=Farnell, ComponentLink1URL=https://datasheet.ciiva.com/31404/1678782-31404872.pdf?src-supplier=Farnell, ComponentLink2Description=https://datasheet.ciiva.com/6201/426256-6201383.pdf?src-supplier=Farnell, ComponentLink2URL=https://datasheet.ciiva.com/6201/426256-6201383.pdf?src-supplier=Farnell, ComponentLink3URL=https://datasheet.ciiva.com/43460/426256-43460335.pdf?src-supplier=Farnell, Construction=Rectangular, Contact Plating=Tin, Depth=0.5mm, Features="Automotive AEC-Q200", Height=0.016inch, Lead Free="Lead Free", Length=1mm, Military Standard=Not, Mount="Surface Mount", Number of Terminations=2, Packaging="Tape and Reel", Power Rating=100mW, Pricing 1="1=0.05180, 10=0.02920, 25=0.02020 (USD)", REACH SVHC="No SVHC", RoHS=Yes, RoHS Compliant=Yes, Series=ERJ, Stock 1=50040, Supplier 1="Arrow Electronics", Supplier Part Number 1=ERJ-2RKF6192X, Termination=SMD/SMT, Tolerance=1%, Voltage Rating (DC)=50V, Width=0.02inch
R9 R10 R13 R14: library part Resistor, "Surface Mount Thick Film Resistor, Rc Series, 10 Kohm, 62.5 Mw, - 1%, 50 V, 0402 [1005 Metric]", Case Code (Imperial)=0402, Case Code (Metric)=1005, Manufacturer=Yageo, Manufacturer Part Number=RC0402FR-0710KL, Max Operating Temperature=155°C, Max Power Dissipation=63mW, Min Operating Temperature=-55°C, Power Rating=62.5mW, Resistance=10kR, Resistance Tolerance=1%, Resistor Type="Thick Film", Temperature Coefficient=100ppm/°C, Voltage Rating=50V, AMBIQ PN=RC0402FR-0710KL, Case/Package=0402, Category="Chip SMD Resistors", ComponentLink1Description=https://datasheet.ciiva.com/7660/38568-7660787.pdf?src-supplier=Element14, ComponentLink1URL=https://datasheet.ciiva.com/7660/38568-7660787.pdf?src-supplier=Element14, ComponentLink2Description=https://datasheet.ciiva.com/7849/1686128-7849814.pdf?src-supplier=Element14, ComponentLink2URL=https://datasheet.ciiva.com/7849/1686128-7849814.pdf?src-supplier=Element14, ComponentLink3URL=https://datasheet.ciiva.com/7983/1018594-7983486.pdf?src-supplier=Element14, Construction=Rectangular, Depth=0.5mm, Features="Moisture Resistant", Height=0.32mm, Lead Free="Lead Free", Lead Pitch=0.2mm, Length=1mm, Military Standard=Not, Number of Pins=2, Number of Terminations=2, Packaging="Tape and Reel", Pricing 1="10000=0.00210 (USD)", REACH SVHC="No SVHC", RoHS=Yes, RoHS Compliant=Yes, Series=RC, Stock 1=7776428, Supplier 1="Arrow Electronics", Supplier Part Number 1=RC0402FR-0710KL, Termination=SMD/SMT, Tolerance=1%, Voltage Rating (DC)=50V, Width=0.5mm, Working Voltage=50V
S1: "Switch", Manufacturer_Name="Omron Electronics", Mouser Part Number=653-B3U-3000PM-B, Arrow Part Number=B3U-3000PM-B, Arrow Price/Stock=https://www.arrow.com/en/products/b3u-3000pm-b/omron?region=nac, Datasheet Link=https://www.mouser.com/datasheet/2/307/en-b3u-3615.pdf, Height=1.35mm, Manufacturer_Part_Number=B3U-3000PM-B, Mouser Price/Stock=https://www.mouser.co.uk/ProductDetail/Omron-Electronics/B3U-3000PM-B?qs=hnUcNC2tU0qDz9eschRYDA%3D%3D
SB1: "None", AMBIQ PN=SBO
SIM1: JLCPCB Part Class=扩展库, LCSC Part Name="拔插式 MicroSD卡(TF卡) 卡座", Manufacturer=MOLEX, Operating Temperature Range=-, Add into BOM=yes, Card Connection Mode=拔插式, Card Type=MicroSD卡(TF卡), Connector Type=卡座, Convert to PCB=yes, Datasheet=https://atta.szlcsc.com/upload/public/pdf/source/20201117/C585350_D1F0B30BD23514449186B2E50ACE8BBF.pdf, Device=1040310811, Manufacturer Part=1040310811, Maximum Body Height=1.42mm, Name=1040310811, Supplier=LCSC, Supplier Footprint=SMD, Supplier Part=C585350, Symbol=1040310811
TP1 TP2 TP3 TP4 TP5 TP6 TP7 TP8 TP9 TP10 TP11 TP12 TP13 TP14 TP15 TP16: library part TP_PAD, "None", AMBIQ PN=TP_PAD
U1: "Linear Voltage Regulator IC Positive Fixed 1 Output 300mA 4-UDFN _1.0x1.0_", Package="UDFN-4 ON Semiconductor", Availability=Unavailable, MF="ON Semiconductor", MP=NCP114AMX330TBG, Price=None, SnapEDA_Link=https://www.snapeda.com/parts/NCP114AMX330TBG/ON%20Semiconductor/view-part/711351/?ref=snap
U2: library part NCP114AMX330TBG, "Linear Voltage Regulator IC Positive Fixed 1 Output 300mA 4-UDFN _1.0x1.0_", Package="UDFN-4 ON Semiconductor", Availability=Unavailable, MF="ON Semiconductor", MP=NCP114AMX330TBG, Price=None, SnapEDA_Link=https://www.snapeda.com/parts/NCP114AMX330TBG/ON%20Semiconductor/view-part/711351/?ref=snap
Y1: "Crystal or Oscillator", Manufacturer_Name="Yangxing Tech", Datasheet Link=https://datasheet.lcsc.com/szlcsc/Yangxing-Tech-X322540MPB4SI_C9010.pdf, Height=0.8mm, Manufacturer_Part_Number=X322540MPB4SI

## Nets (pads, with @x,y where several pads share a name; then routed paths per layer and width w, separated by ;. In a path a pad name is that pad's centre, name@x,y a point inside that pad or via, vN(x,y) a via of type N, cw(c..) or ccw(c..) an arc to the next point about the centre after c; other vN are vias at no path point)
AP_USB_N: IC1.25 IC6.3
AP_USB_P: IC1.26 IC6.1
CHIP_PU: C15.1 IC1.4 R6.1 | length 6.5
  TOP w0.203: C15.1 7.275,20.089 R6.1 R6.1 9.363,20.92 ccw(c8.932,21.351) 9.541,21.351 9.541,23.427 cw(c10.151,23.427) 10.151,24.036 IC1.4
GND: BUZZER1.3 C1.2 C2.2 C3.2 C4.2 C5.2 C6.2 C7.2 C8.1 C9.2 C10.2 C11.2 C12.2 C13.2 C14.2 C15.2 C16.2 C17.2 C18.2 C19.2 C20.2 C21.2 C22.2 C23.2 C24.2 C25.2 C26.2 C27.2 C28.2 C29.2 C30.2 C31.2 C32.2 C33.2 C34.2 CN1.2 CN1.10 CN1.11 CN1.14 CN1.17 CN1.21 CN1.33 CN1.35 CN1.36 CN1.37 CN1.38 IC1.57 IC2.4 IC2.9 IC3.3 IC3.7 IC4.5 IC4.9 IC5.4 IC5.8 IC6.2 J1.MP1 J1.MP2 J1.MP3 J1.MP4 Q1.3 R8.2 R9.1 R10.2 R14.1 S1.1 SIM1.6 SIM1.9 SIM1.10 SIM1.11 SIM1.12 SIM1.13 SIM1.14 TP2.TP TP6.TP TP12.TP TP15.TP TP16.TP U1.2 U1.5 U2.2 U2.5 Y1.2 Y1.4 | length 4.9
  TOP w0.203: C5.2 C4.2 C3.2 12.354,29.829 13.401,29.829 Y1.4 ; Y1.2 16.037,28.565 17.211,28.565 C2.2
GPIO0: IC1.5 S1.2
GPIO1: CN1.1 IC1.6
GPIO2: CN1.34 IC1.7
GPIO3: CN1.28 IC1.8
GPIO4: CN1.24 IC1.9
GPIO5: CN1.7 IC1.10
GPIO6: CN1.8 IC1.11
GPIO7: CN1.5 IC1.12
GPIO8: CN1.4 IC1.13
GPIO9: CN1.3 IC1.14
GPIO10: CN1.31 IC1.15 R4.2 | length 2.1
  TOP w0.203: R4.2 10.795,17.521 cw(c11.405,17.519) 10.972,17.949 11.39,18.367 ccw(c10.959,18.798) 11.563,18.719 ; 11.564,18.72 11.564,19.185 IC1.15
GPIO11: CN1.30 IC1.16 R5.2 | length 1.8
  TOP w0.203: R5.2 11.963,18.825 cw(c12.573,18.825) 11.964,18.841 11.965,18.896 ccw(c11.356,18.911) 11.965,18.911 IC1.16
GPIO12: CN1.29 IC1.17
GPIO13: CN1.6 IC1.18
GPIO14: IC1.19 IC5.5
GPIO15: IC1.21 SIM1.5
GPIO16: IC1.22 SIM1.3
GPIO17: IC1.23 SIM1.7
GPIO18: IC1.24 SIM1.8
GPIO21: IC1.27 SIM1.2
GPIO38: IC1.43 IC5.3
GPIO39: IC1.44 TP8.TP
GPIO40: IC1.45 TP7.TP
GPIO41: IC1.47 TP9.TP
GPIO42: IC1.48 TP10.TP
GPIO45: IC1.51 R13.2
GPIO46: IC1.52
GPIO47: IC1.37 IC5.2
GPIO48: IC1.36 SIM1.1
NetANT1_1: ANT1.1 C6.1 R1.1 R3.2 | length 6
  TOP w0.203: ANT1.1 4.34,31.115 6.452,29.003 R3.2 6.473,28.934 7.42,27.987 C6.1 7.42,27.902 8.427,26.895 R1.1
NetBUZZER1_2: BUZZER1.2 Q1.1
NetC7_1: C7.1 IC1.1 R1.2 | length 2.8
  TOP w0.203: C7.1 9.68,26.633 9.208,26.16 R1.2 9.236,26.07 9.892,25.414 ccw(c10.321,25.847) 10.307,25.238 10.714,25.238 IC1.1
NetC8_2: C8.2 R3.1 | length 0.9
  TOP w0.203: R3.1 7.217,29.722 7.823,30.328 C8.2
NetC12_1: C12.1 IC1.2 IC1.3 L1.2 | length 4.7
  TOP w0.203: C12.1 8.861,23.93 L1.2@8.861,24.586 ; IC1.3 9.263,24.436 9.157,24.542 8.906,24.542 L1.2@8.861,24.586 ; IC1.2 10.714,24.835 8.902,24.835 L1.2 8.861,24.736 L1.2@8.861,24.586
NetC33_1: C33.1 IC5.1
NetC34_1: C34.1 IC5.6
NetCN1_12: CN1.12
NetCN1_13: CN1.13
NetCN1_15: CN1.15
NetCN1_16: CN1.16
NetCN1_18: CN1.18
NetFB1_1: FB1.1 TP3.TP
NetIC3_2: IC3.2 R7.1 R8.1
NetIC4_6: IC4.6 R9.2
NetIC4_7: IC4.7 R10.1
NetIC6_4: IC6.4 TP4.TP
NetIC6_6: IC6.6 TP5.TP
NetQ1_2: Q1.2 R13.1 R14.2
NetR2_2: R2.2 TP13.TP
OUT+: IC5.7 J1.1 J1.3 J1.5
OUT-: IC5.9 J1.2 J1.4 J1.6
SPICLK: IC1.33 IC2.6
SPICS0: IC1.32 IC2.1
SPID: IC1.35 IC2.5
SPIHD: IC1.30 IC2.7
SPIQ: IC1.34 IC2.2
SPIWP: IC1.31 IC2.3
U0RXD: IC1.50 TP14.TP
U0TXD: IC1.49 R2.1 | length 5.5
  TOP w0.127: IC1.49 14.365,26.553 cw(c14.746,26.552) 14.518,26.857 ccw(c10.802,31.874) 14.89,27.155 ccw(c12.197,30.264) 15.055,27.306 cw(c15.318,27.031) 15.318,27.412 17.069,27.412 ccw(c17.069,27.793) 17.338,27.523 R2.1
VBAT: C20.1 C21.1 C22.1 C23.1 C24.1 C25.1 C26.1 C27.1 C29.1 IC3.4 IC3.6 IC4.8 SB1.2 TP1.TP U1.3 U1.4 U2.3 U2.4
VBUS_5V: C28.1 FB1.2 IC4.1 IC6.5 SB1.1
VDD_1.8V: C19.1 CN1.9 CN1.22 CN1.27 U2.1
VDD_3.3V: BUZZER1.1 C1.1 C4.1 C5.1 C9.1 C10.1 C11.1 C13.1 C14.1 C16.1 C17.1 C30.1 C31.1 C32.1 CN1.23 IC1.20 IC1.29 IC1.46 IC1.55 IC1.56 L1.1 R4.1 R5.1 R6.2 SIM1.4 TP11.TP U1.1 | length 14.2
  TOP w0.127: C10.1 C9.1 C11.1 7.981,23.903 L1.1 L1.1 ; C5.1 10.633,28.55 ccw(c10.841,28.716) 10.652,28.529 11.454,27.726 cw(c11.184,27.457) 11.565,27.459 11.565,27.457 IC1.56 ; C4.1 11.506,28.55 11.854,28.202 cw(c11.584,27.933) 11.965,27.933 IC1.55 ; C16.1@13.565,17.401 IC1.20 ; IC1.46 15.565,26.736 cw(c15.946,26.735) 15.834,27.099 cw(c16.024,26.478) 16.024,27.127 C1.1
VDD_3.7V: C18.1 CN1.25 CN1.26 IC3.1 IC5.10 R7.2
VDD_SPI: IC2.8
XTAL_N: C2.1 IC1.53 Y1.3 | length 7.6
  TOP w0.203: IC1.53 ccw(c12.157,26.13) IC1.53@12.767,26.129 ; 12.767,26.627 cw(c13.376,26.626) 13.375,27.235 14.182,27.235 ccw(c14.18,27.845) 14.79,27.845 14.79,28.323 14.79,28.758 cw(c15.399,28.758) 14.968,29.189 15.857,30.078 Y1.3 16.088,29.855 17.211,29.855 C2.1 ; IC1.53@12.767,26.129 12.767,26.627
XTAL_P: C3.1 IC1.54 Y1.1 | length 4.5
  TOP w0.203: C3.1 12.354,28.54 13.503,28.54 Y1.1 13.257,28.085 13.308,28.085 cw(c13.064,28.268) 13.28,28.053 12.545,27.318 ccw(c12.976,26.888) 12.367,26.888 IC1.54 IC1.54
pads on no net: ANT1.2 CN1.19 CN1.20 CN1.32 IC1.28 IC1.38 IC1.39 IC1.40 IC1.41 IC1.42 IC3.5 IC4.2 IC4.3 IC4.4 S1.3

## Polygon pours and split planes (outlines as drawn)
VDD_1.8V on TOP "VDD_1.8V" (solid, remove dead copper, pour order 4): 14.935,9.119 14.783,9.271 14.783,9.677 14.859,9.754 17.069,9.754 17.069,9.449 16.739,9.119
VDD_3.3V on TOP "VDD_3.3V" (solid, remove dead copper, pour order 5): 14.883,11.86 14.73,12.012 14.73,12.419 14.806,12.495 17.016,12.495 17.016,12.19 16.686,11.86
VBAT on TOP "VDD_5V" (solid, pour order 8): 17.296,12.52 17.296,12.114 17.55,11.86 17.55,11.606 17.296,11.352 17.296,11.25 17.931,11.25 17.981,11.301 17.981,11.936 18.032,11.987 20.344,11.987 20.344,12.52
GND on TOP "NONET_L01_P013" (solid, remove dead copper, shelved, pour order 13): 0,3.466 ccw(c3.45,3.466) 1.852,0.408 cw(c2.371,-0.134) 3.106,0.017 26.596,0.017 cw(c27.331,-0.133) 27.849,0.409 ccw(c26.252,3.467) 29.702,3.467 29.692,32.067 ccw(c26.242,32.067) 27.839,35.124 cw(c27.32,35.666) 26.585,35.516 3.106,35.515 cw(c2.371,35.665) 1.852,35.124 ccw(c3.45,32.066) 0,32.066
VBAT on TOP "VBAT_2" (solid, pour order 10): 25.781,19.482 27.127,19.482 27.127,17.628 26.365,17.628 26.365,15.824 27.178,15.824 27.178,14.453 25.121,14.453 25.121,17.602 25.781,17.602
VBAT on TOP "VBAT" (solid, pour order 7): 17.374,9.754 17.374,9.347 17.628,9.093 17.628,8.839 17.374,8.585 17.374,8.484 18.009,8.484 18.059,8.534 18.059,9.169 18.11,9.22 20.752,9.22 20.752,9.754
GND on BOTTOM "GND_L04_P014" (solid, remove dead copper, pour order 14): 0,3.466 ccw(c3.45,3.466) 1.852,0.408 cw(c2.371,-0.134) 3.106,0.017 26.596,0.017 cw(c27.331,-0.133) 27.849,0.409 ccw(c26.252,3.467) 29.702,3.467 29.692,32.067 ccw(c26.242,32.067) 27.839,35.124 cw(c27.32,35.666) 26.585,35.516 3.106,35.515 cw(c2.371,35.665) 1.852,35.124 ccw(c3.45,32.066) 0,32.066
VBAT on BOTTOM "VBAT" (solid, pour order 2): 28.184,8.179 28.184,5.639 29.591,5.639 29.591,8.18
GND on LY2 - GND "GND_L02_P015" (solid, remove dead copper, pour order 15): 0,3.466 ccw(c3.45,3.466) 1.852,0.408 cw(c2.371,-0.134) 3.106,0.017 26.596,0.017 cw(c27.331,-0.133) 27.849,0.409 ccw(c26.252,3.467) 29.702,3.467 29.692,32.067 ccw(c26.242,32.067) 27.839,35.124 cw(c27.32,35.666) 26.585,35.516 3.106,35.515 cw(c2.371,35.665) 1.852,35.124 ccw(c3.45,32.066) 0,32.066
GND on LY3 - GND "GND_L03_P016" (solid, remove dead copper, pour order 16): 0,3.466 ccw(c3.45,3.466) 1.852,0.408 cw(c2.371,-0.134) 3.106,0.017 26.596,0.017 cw(c27.331,-0.133) 27.849,0.409 ccw(c26.252,3.467) 29.702,3.467 29.692,32.067 ccw(c26.242,32.067) 27.839,35.124 cw(c27.32,35.666) 26.585,35.516 3.106,35.515 cw(c2.371,35.665) 1.852,35.124 ccw(c3.45,32.066) 0,32.066

## Keep-outs
Keep-Out Layer:
  the board outline again, w0.203

## Other copper
TOP:
  text "TOP" at -15.033,-5.428 h3.17
LY2 - GND:
  text "LAYER 2" at -7.114,-5.463 h3.17
LY3 - GND:
  text "LAYER 3" at 6.485,-5.428 h3.17
BOTTOM:
  text "BOT" at 20.105,-5.428 h3.17

## Silkscreen, mask and mechanical layers (free items; w line width, h text height)
Top Overlay:
  text "SILKTOP" at -14.99,-7.952 h3.17
Bottom Overlay:
  text "SILKBOT" at 25.796,-7.952 h3.17
Top Paste:
  text "PASTETOP" at -2.906,-7.952 h3.17
Bottom Paste:
  text "PASTEBOT" at 37.988,-7.952 h3.17
Top Solder:
  text "MASKTOP" at 12.08,-7.952 h3.17
Bottom Solder:
  text "MASKBOT" at 52.974,-7.952 h3.17
Board Shape:
  region: 0.922,26.695 ccw(c1.422,26.695) 1.422,26.195 ccw(c1.422,26.695) 1.922,26.695 ccw(c1.422,26.695) 1.422,27.195 ccw(c1.422,26.695)
  region: 0.922,19.075 ccw(c1.422,19.075) 1.422,18.575 ccw(c1.422,19.075) 1.922,19.075 ccw(c1.422,19.075) 1.422,19.575 ccw(c1.422,19.075)
  lines w0.203: 0,3.466 ccw(c3.45,3.466) 1.852,0.408 cw(c2.371,-0.134) 3.106,0.017 26.596,0.017 cw(c27.331,-0.133) 27.849,0.409 ccw(c26.252,3.467) 29.702,3.467 29.692,32.067 ccw(c26.242,32.067) 27.839,35.124 cw(c27.32,35.666) 26.585,35.516 3.106,35.515 cw(c2.371,35.665) 1.852,35.124 ccw(c3.45,32.066) 0,32.066 0,3.466
Top Assembly:
  lines w0.025: -65.035,-20.585 -61.886,-20.585 ; -65.035,20.867 -61.886,20.867 ; -65.035,62.32 -61.886,62.32 ; -22.059,-65.162 -22.059,-62.013 ; -22.059,103.748 -22.059,106.923 ; 11.088,-65.162 11.088,-62.013 ; 11.088,103.748 11.088,106.923 ; 45.048,-65.162 45.048,-62.013 ; 45.048,103.748 45.048,106.923 ; 78.195,-65.162 78.195,-62.013 ; 78.195,103.748 78.195,106.923 ; 112.13,-65.162 112.13,-62.013 ; 112.13,103.544 112.13,106.719 ; 152.617,-20.585 155.792,-20.585 ; 152.617,20.867 155.792,20.867 ; 152.617,62.32 155.792,62.32 ; -61.759,-61.911 -61.759,103.748 152.617,103.748 152.617,-61.911 -61.759,-61.911
  lines w0.076: 85.841,-62.013 85.841,-42.277
  lines w0.152: 38.47,-60.032 58.205,-60.032 ; 38.47,-58.076 58.205,-58.076 ; 38.47,-56.095 58.205,-56.095 ; 38.47,-54.113 58.205,-54.113 ; 38.47,-52.158 58.205,-52.158 ; 38.47,-50.176 58.205,-50.176 ; 38.47,-48.195 58.205,-48.195 ; 38.47,-46.239 58.205,-46.239 ; 38.47,-44.258 58.205,-44.258 ; 38.47,-42.277 58.205,-42.277 ; 38.571,-42.277 38.571,-62.013 40.146,-62.013 ; 47.639,-60.032 47.639,-42.277 ; 58.205,-62.013 58.205,-42.277 ; 58.205,-45.046 85.841,-45.046 107.151,-45.046 ; 85.841,-59.244 100.065,-59.244 107.151,-59.244 ; 85.841,-56.501 100.065,-56.501 107.151,-56.501 ; 85.841,-53.326 100.065,-53.326 107.151,-53.326 ; 85.841,-50.583 100.065,-50.583 107.151,-50.583 ; 85.841,-47.814 107.151,-47.814 ; 103.671,99.811 152.617,99.811 ; 103.671,103.748 103.671,101.792 ; 106.846,97.829 106.846,101.792 ; 107.151,-62.013 107.151,-42.277 ; 107.227,-60.032 152.617,-60.032 ; 107.227,-56.501 152.617,-56.501 ; 107.227,-47.814 152.617,-47.814 ; 110.402,-60.032 110.402,-56.501 ; 115.127,-62.013 115.127,-60.032 ; 138.419,-62.013 138.419,-60.032 ; 138.419,97.829 138.419,101.792 ; 144.743,97.829 144.743,101.792 ; 148.68,-60.032 148.68,-56.501 ; 152.617,-42.277 58.205,-42.277 ; 152.617,97.829 103.671,97.829 103.671,101.792 ; 152.617,101.792 103.671,101.792
  lines w0.406: -65.823,-58.863 -65.823,-65.975 -58.711,-65.975 ; -65.823,100.598 -65.823,107.71 -58.711,107.71 ; 149.366,-66.28 156.478,-66.28 156.478,-59.168 ; 149.468,107.71 156.58,107.71 156.58,100.598
  lines w0.432: -61.759,-61.911 -61.759,103.748 152.617,103.748 152.617,-61.911 -61.759,-61.911
  text "6" at -38.823,104.154 h1.27
  text "5" at -5.295,104.154 h1.27
  text "4" at 27.09,104.154 h1.27
  text "3" at 61.609,104.154 h1.27
  text "2" at 95.747,104.154 h1.27
  text "1" at 127.522,104.154 h1.27
  text "REVISIONS" at 121.832,102.173 h0.76
  text "NOTES:" at -59.27,100.877 h1.02
  text "DESCRIPTION" at 114.746,100.598 h0.76
  text "DATE" at 139.206,100.598 h0.76
  text "APPROVAL" at 145.531,100.598 h0.76
  text "REV" at 104.281,100.395 h0.76
  text "'.TBRevision'" at 104.484,98.388 h0.76
  text "Initial Release" at 107.634,98.236 h0.76
  text "'.ModifiedDate'" at 138.8,98.236 h0.76
  text "D" at -64.451,76.316 h1.27
  text "D" at 153.227,76.316 h1.27
  text "C" at -64.629,35.066 h1.27
  text "C" at 153.024,35.066 h1.27
  text "B" at -64.629,-3.009 h1.27
  text "B" at 153.024,-3.009 h1.27
  text "ASSEMBLY TOP SIDE" at 31.375,-4.543 h3.17
  text "DATE" at 101.385,-43.623 h0.64
  text "A" at -64.832,-43.852 h1.27
  text "APPROVAL" at 86.247,-43.852 h0.64
  text "A" at 152.82,-43.852 h1.27
  text "SHM" at 109.92,-46.138 h1.6
  text "UNLESS OTHERWISE SPECIFIED" at 60.466,-46.239 h0.64
  text "DRAWN" at 86.247,-46.239 h0.64
  text "'.ModifiedDate'" at 99.963,-47.255 h0.64
  text "'.TBDrawnBy'" at 86.199,-47.591 h0.64